# EAGLE board 2_dsub to pins (EAGLE 7.2.0)
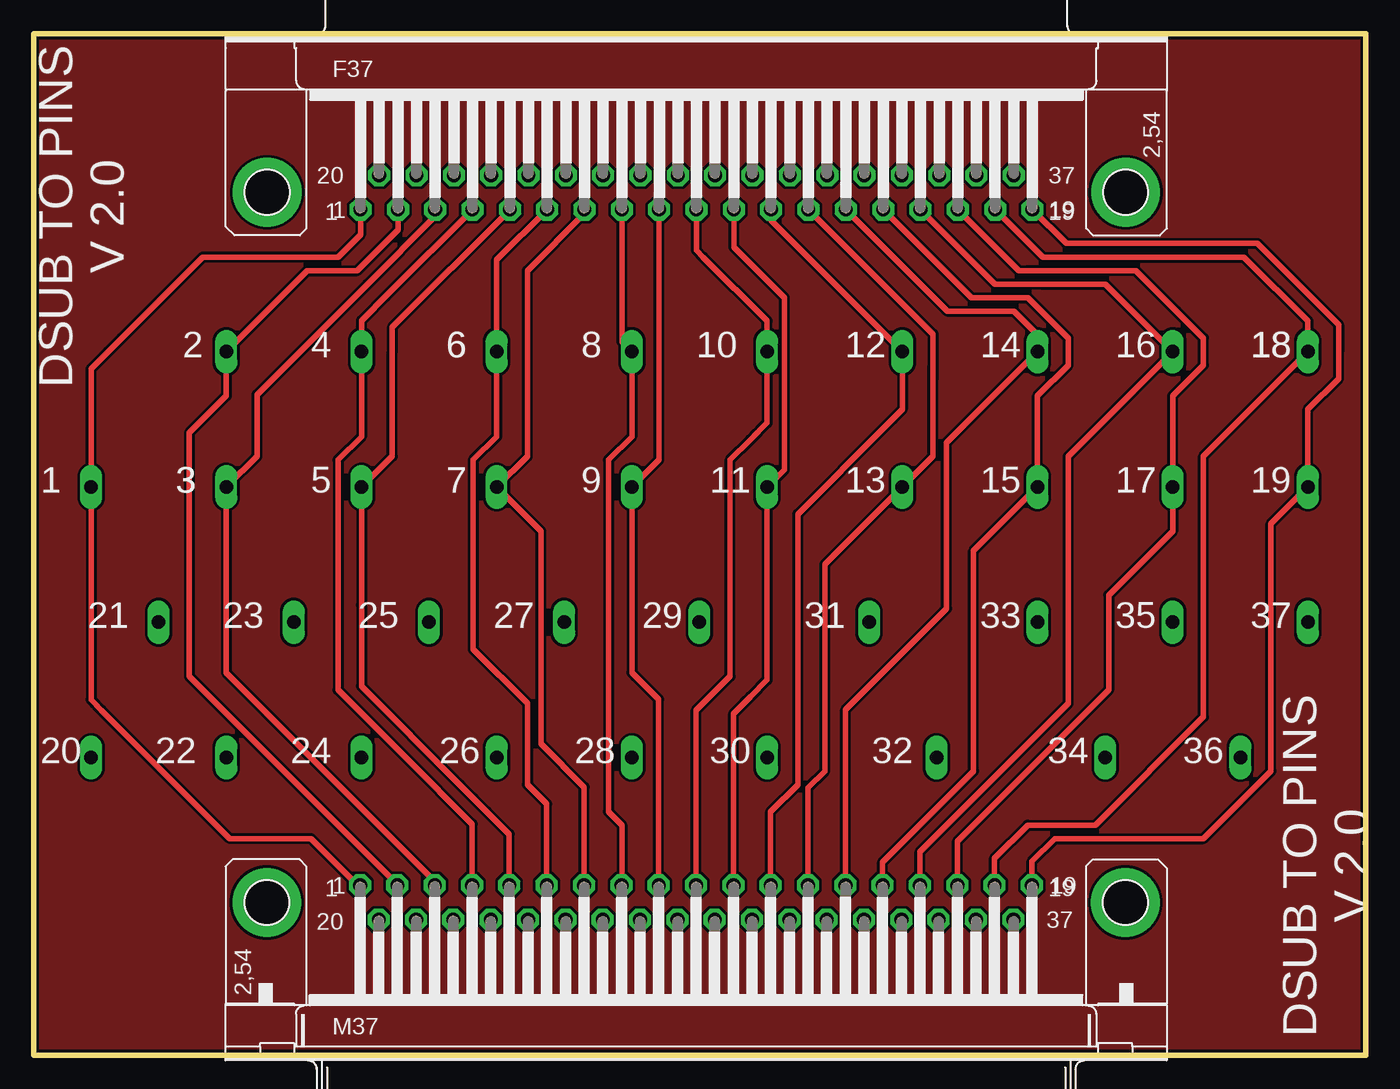
[diagram p0: board, top side]
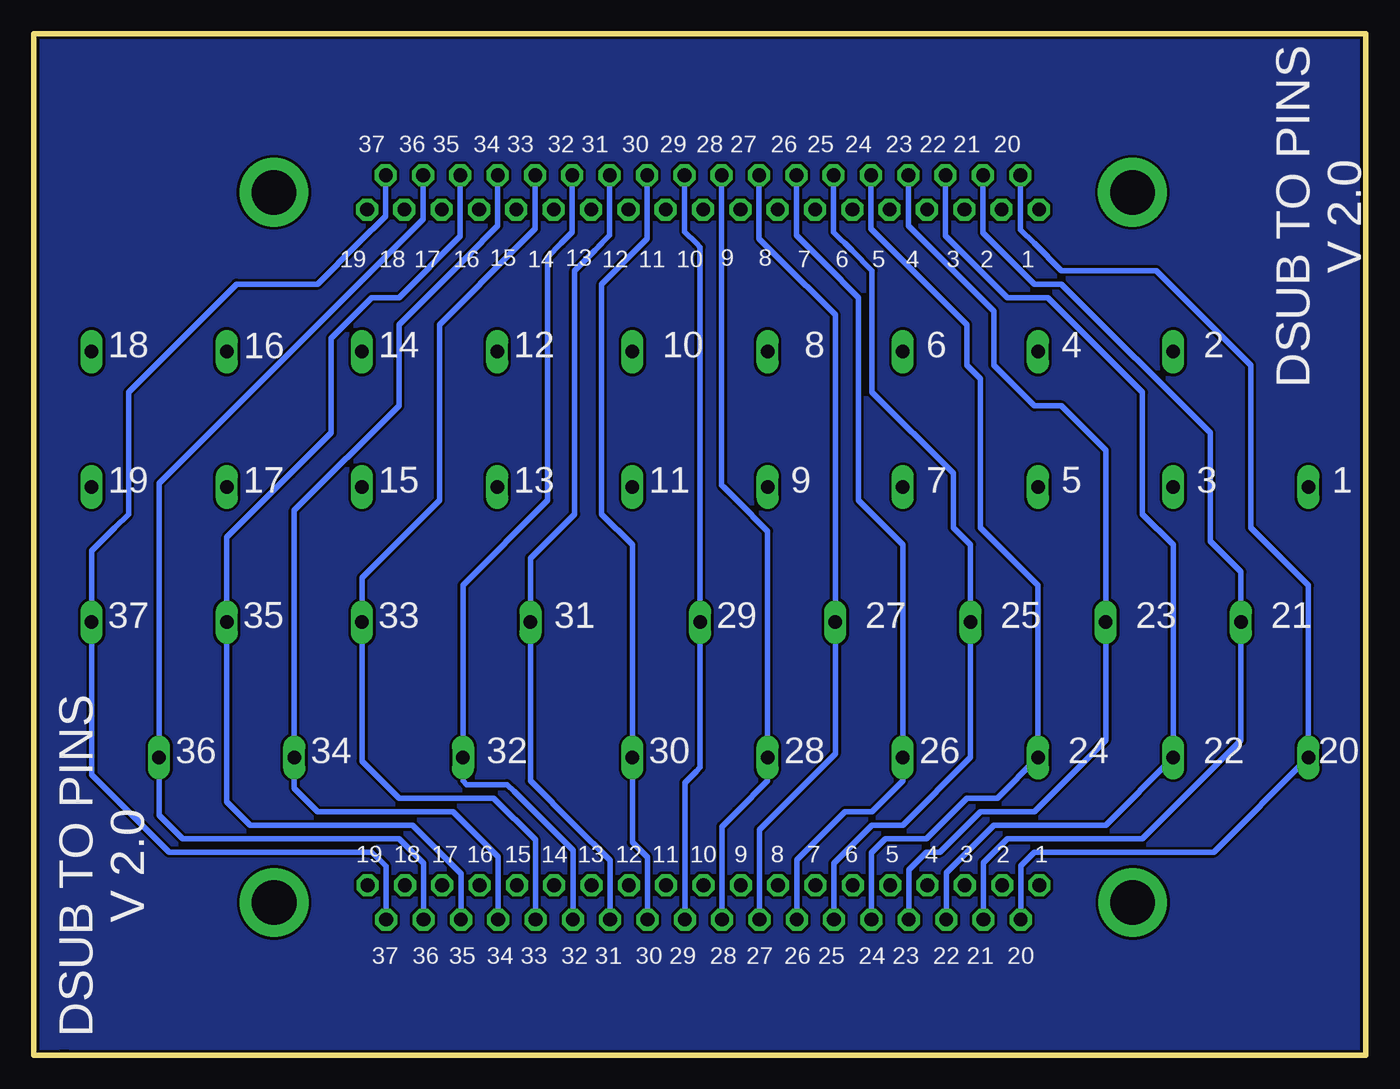
[diagram p1: board, bottom side, seen from below]

Size 98.5 x 75.5 mm. Coordinates in mm from the lower left corner, seen from the top.
Outline: 96.5,0 0,0 0,75.5 98.5,75.5 98.5,0 96,0
Copper layers (1*16): Top 0.035mm / dielectric 1.5mm / Bottom 0.035mm
Design rules "SparkFun-2-layer": minimum track width 7mil, minimum drill 15mil, track to track 8mil, track to pad 8mil, pad to pad 8mil, via to via 8mil, smd to smd 8mil, copper to edge 8mil, drill to drill 8mil, minimum pad ring 12mil, minimum via ring 10mil, stop-mask expansion 4mil, vias tented up to drill 20mil, thermal gap 10mil

## Footprints (pad centres in the part's own frame; a part is rotated, then mirrored left to right if it is on the bottom)
22-23-2021 = drill 1 long: 1 -1.27,0
M37HP = drill 1.016 octagon: 1 -24.841,1.27; 2 -22.098,1.27; 3 -19.329,1.27; 4 -16.561,1.27; 5 -13.818,1.27; 6 -11.049,1.27; 7 -8.28,1.27; 8 -5.512,1.27; 9 -2.769,1.27; 10 0,1.27; 11 2.769,1.27; 12 5.512,1.27; 13 8.28,1.27; 14 11.049,1.27; 15 13.792,1.27; 16 16.561,1.27; 17 19.329,1.27; 18 22.073,1.27; 19 24.841,1.27; 20 -23.47,-1.27; 21 -20.701,-1.27; 22 -17.958,-1.27; 23 -15.189,-1.27; 24 -12.421,-1.27; 25 -9.652,-1.27; 26 -6.909,-1.27; 27 -4.14,-1.27; 28 -1.372,-1.27; 29 1.372,-1.27; 30 4.14,-1.27; 31 6.909,-1.27; 32 9.652,-1.27; 33 12.421,-1.27; 34 15.189,-1.27; 35 17.932,-1.27; 36 20.701,-1.27; 37 23.47,-1.27 | drill 3.302 pad 5.08: G1 -31.75,0; G2 31.75,0
F37HP = drill 1.016 octagon: 1 -24.841,-1.27; 2 -22.073,-1.27; 3 -19.329,-1.27; 4 -16.561,-1.27; 5 -13.792,-1.27; 6 -11.049,-1.27; 7 -8.28,-1.27; 8 -5.512,-1.27; 9 -2.769,-1.27; 10 0,-1.27; 11 2.769,-1.27; 12 5.512,-1.27; 13 8.28,-1.27; 14 11.049,-1.27; 15 13.818,-1.27; 16 16.561,-1.27; 17 19.329,-1.27; 18 22.098,-1.27; 19 24.841,-1.27; 20 -23.47,1.27; 21 -20.701,1.27; 22 -17.932,1.27; 23 -15.189,1.27; 24 -12.421,1.27; 25 -9.652,1.27; 26 -6.909,1.27; 27 -4.14,1.27; 28 -1.372,1.27; 29 1.372,1.27; 30 4.14,1.27; 31 6.909,1.27; 32 9.677,1.27; 33 12.421,1.27; 34 15.189,1.27; 35 17.958,1.27; 36 20.701,1.27; 37 23.47,1.27 | drill 3.302 pad 5.08: G1 -31.75,0; G2 31.75,0

## Placement (x,y rotation side)
X1  22-23-2021  [22-23-2021]  5.5,42 0 top
X2  22-23-2021  [22-23-2021]  15.5,52 0 top
X3  22-23-2021  [22-23-2021]  15.5,42 0 top
X4  22-23-2021  [22-23-2021]  25.5,52 0 top
X5  22-23-2021  [22-23-2021]  25.5,42 0 top
X6  22-23-2021  [22-23-2021]  35.5,52 0 top
X7  22-23-2021  [22-23-2021]  35.5,42 0 top
X8  22-23-2021  [22-23-2021]  45.5,52 0 top
X9  22-23-2021  [22-23-2021]  45.5,42 0 top
X10  22-23-2021  [22-23-2021]  55.5,52 0 top
X11  22-23-2021  [22-23-2021]  55.5,42 0 top
X12  22-23-2021  [22-23-2021]  65.5,52 0 top
X13  22-23-2021  [22-23-2021]  65.5,42 0 top
X14  22-23-2021  [22-23-2021]  75.5,52 0 top
X15  22-23-2021  [22-23-2021]  75.5,42 0 top
X16  22-23-2021  [22-23-2021]  85.5,52 0 top
X17  22-23-2021  [22-23-2021]  85.5,42 0 top
X18  22-23-2021  [22-23-2021]  95.5,52 0 top
X19  22-23-2021  [22-23-2021]  95.5,42 0 top
X20  22-23-2021  [22-23-2021]  5.5,22 0 top
X21  22-23-2021  [22-23-2021]  10.5,32 0 top
X22  22-23-2021  [22-23-2021]  15.5,22 0 top
X23  22-23-2021  [22-23-2021]  20.5,32 0 top
X24  22-23-2021  [22-23-2021]  25.5,22 0 top
X25  22-23-2021  [22-23-2021]  30.5,32 0 top
X26  22-23-2021  [22-23-2021]  35.5,22 0 top
X27  22-23-2021  [22-23-2021]  40.5,32 0 top
X28  22-23-2021  [22-23-2021]  45.5,22 0 top
X29  22-23-2021  [22-23-2021]  50.5,32 0 top
X30  22-23-2021  [22-23-2021]  55.5,22 0 top
X31  22-23-2021  [22-23-2021]  60.5,32 180 top
X32  22-23-2021  [22-23-2021]  65.5,22 180 top
X33  22-23-2021  [22-23-2021]  75.5,32 0 top
X34  22-23-2021  [22-23-2021]  80.5,22 0 top
X35  22-23-2021  [22-23-2021]  85.5,32 0 top
X36  22-23-2021  [22-23-2021]  90.5,22 0 top
X37  22-23-2021  [22-23-2021]  95.5,32 0 top
X40  [M37HP]  48.98,11.29 0 top
X41  [F37HP]  49,63.78 0 top

## Library data of the parts
X1-X37 = mayo; MF: MOLEX; MPN: 22-23-2021; OC_FARNELL: 1462926; OC_NEWARK: 25C3832
X40 X41 = con-subd; OC_FARNELL: unknown; OC_NEWARK: unknown

## Nets
1: X1.1 X40.1 X41.1
2: X2.1 X40.2 X41.2
3: X3.1 X40.3 X41.3
4: X4.1 X40.4 X41.4
5: X5.1 X40.5 X41.5
6: X6.1 X40.6 X41.6
7: X7.1 X40.7 X41.7
8: X8.1 X40.8 X41.8
9: X9.1 X40.9 X41.9
10: X10.1 X40.10 X41.10
11: X11.1 X40.11 X41.11
12: X12.1 X40.12 X41.12
13: X13.1 X40.13 X41.13
14: X14.1 X40.14 X41.14
15: X15.1 X40.15 X41.15
16: X16.1 X40.16 X41.16
17: X17.1 X40.17 X41.17
18: X18.1 X40.18 X41.18
19: X19.1 X40.19 X41.19
20: X20.1 X40.20 X41.20
21: X21.1 X40.21 X41.21
22: X22.1 X40.22 X41.22
23: X23.1 X40.23 X41.23
24: X24.1 X40.24 X41.24
25: X25.1 X40.25 X41.25
26: X26.1 X40.26 X41.26
27: X27.1 X40.27 X41.27
28: X28.1 X40.28 X41.28
29: X29.1 X40.29 X41.29
30: X30.1 X40.30 X41.30
31: X31.1 X40.31 X41.31
32: X32.1 X40.32 X41.32
33: X33.1 X40.33 X41.33
34: X34.1 X40.34 X41.34
35: X35.1 X40.35 X41.35
36: X36.1 X40.36 X41.36
37: X37.1 X40.37 X41.37

## Tracks (layer width: path | path; a pad name or v marks a point on that pad's centre or on a via)
1
  Top 0.406: X41.1 24.16,60.66 22.5,59 12.5,59 6.5,53 | 6.5,53 5.5,52 | 6.5,53 4.23,50.73 X1.1 4.23,26.27 5,25.5 | 14.5,16 13.5,17 | 13.5,17 5,25.5 | 5,25.5 4.5,26 | X40.1 23.94,12.56 20.5,16 14.5,16 | 14.5,16 13.5,17
2
  Top 0.406: X41.2 26.93,61 23.93,58 20.23,58 X2.1 14.23,48.73 11.5,46 11.5,28 22,17.5 | 22,17.5 22.5,17 | X40.2 26.88,12.62 22,17.5
3
  Top 0.406: X41.3 29.67,62 24.67,57 16.5,48.83 16.5,44.27 X3.1 14.23,28.27 15.5,27 | 15.5,27 24.5,18 29.65,12.85 X40.3 | 15.5,27 14.5,28
4
  Top 0.406: 26.21,56.28 25.93,56 26.21,56.28 | 26.21,56.28 X41.4 | X40.4 32.42,17.08 27.5,22 22.5,27 22.5,44 24.23,45.73 X4.1 24.23,54.3 26.21,56.28
5
  Top 0.406: X41.5 26.5,53.8 26.5,52 26.5,44.27 X5.1 24.23,33.27 24.23,27.27 31.5,20 33.5,18 | X40.5 35.16,16.34 33.5,18 | 33.5,18 32.5,19
6
  Top 0.406: X41.6 34.23,58.79 X6.1 34.23,45.73 32.5,44 32.5,30 36.5,26 36.5,20 37,19.5 | 37,19.5 37.5,19 | X40.6 37.93,18.57 37,19.5
7
  Top 0.406: X41.7 40.72,62.22 36.5,58 36.5,44.27 X7.1 37.5,38.73 37.5,23 40.7,19.8 X40.7
8
  Top 0.406: X41.8 43.49,52.74 X8.1 44.23,45.73 42.5,44 42.5,18 43.5,17 43.5,12.59 X40.8
9
  Top 0.406: X41.9 46.23,44 X9.1 44.23,28.27 45.5,27 | X40.9 46.21,26.29 45.5,27 | 45.5,27 44.5,28
10
  Top 0.406: X41.10 49,59.5 49.5,59 54.23,54.27 X10.1 54.23,46.73 53,45.5 | X40.10 48.98,25.48 51.5,28 51.5,44 53,45.5 | 53,45.5 53.5,46
11
  Top 0.406: X41.11 51.77,59.73 55.5,56 55.5,43.27 X11.1 54.23,27.73 53,26.5 | 53,26.5 52.5,26 | X40.11 51.75,25.25 53,26.5
12
  Top 0.406: X41.12 54.51,61.72 X12.1 64.23,47.73 63,46.5 | X40.12 54.49,17.99 56.5,20 56.5,40 63,46.5 | 63,46.5 63.5,47
13
  Top 0.406: X40.13 57.26,19.76 58.5,21 58.5,36.27 X13.1 66.5,44.27 66.5,51 | X41.13 66.5,53.29 66.5,51 | 66.5,51 66.5,50
14
  Top 0.406: X40.14 60.03,25.53 67.5,33 67.5,45.27 X14.1 74.23,53.27 72.5,55 67.56,55 X41.14
15
  Top 0.406: 75.5,54 76.5,53 76.5,51 74.23,48.73 X15.1 69.5,37.27 69.5,21 62.77,14.27 X40.15 | 75.5,54 74.5,55 | X41.15 69.33,56 72.5,56 73.5,56 75.5,54
16
  Top 0.406: X41.16 71.07,57 74.5,57 79.23,57 X16.1 76.5,44.27 76.5,26 65.54,15.04 X40.16
17
  Top 0.406: X40.17 68.31,15.81 68.5,16 79.5,27 79.5,34 84.23,38.73 X17.1 84.23,48.73 86.5,51 86.5,53 84.5,55 81.5,58 75.5,58 | 75.5,58 73.5,58 | X41.17 72.84,58 75.5,58
18
  Top 0.406: X41.18 72.61,61 74.61,59 78.5,59 | X40.18 71.05,14.55 73.5,17 78.5,17 86.5,25 86.5,44.27 X18.1 94.23,54.27 89.5,59 78.5,59 | 77.5,59 78.5,59
19
  Top 0.406: 96.5,52 96.5,50 94.23,47.73 X19.1 91.5,39.27 91.5,21 86.5,16 75.5,16 73.82,14.32 X40.19 | 96.5,52 96.5,54 | 96.5,54 95.5,55 | 78.5,60 80.5,60 | 80.5,60 90.5,60 96.5,54 | 96.5,54 96.5,52 | X41.19 76.35,60 80.5,60
20
  Bottom 0.406: X41.20 25.53,61.03 24.5,60 22.5,58 15.5,58 8.5,51 8.5,39 4.23,34.73 X20.1 11.23,15 24.5,15 25.51,13.99 X40.20
21
  Bottom 0.406: 26,58.5 24.5,57 22.5,57 11.5,46 11.5,38 9.23,35.73 X21.1 9.23,23.27 10,22.5 | 26,58.5 26.5,59 | X41.21 28.3,60.8 26,58.5 | X40.21 28.28,14.22 26.5,16 16.5,16 10,22.5 | 10,22.5 9.5,23
22
  Bottom 0.406: X41.22 31.07,60.57 28.5,58 26.5,56 23.5,56 16.5,49 16.5,40 14.23,37.73 X22.1 19.23,17 27.5,17 31.02,13.48 X40.22
23
  Bottom 0.406: X41.23 33.81,61.31 31.5,59 27.5,55 27.5,51 24.5,48 22.5,48 19.23,44.73 X23.1 19.23,23.27 24.5,18 28.5,18 31.5,15 32.5,15 33.79,13.71 X40.23
24
  Bottom 0.406: X41.24 36.58,61.08 34.5,59 29.5,54 29.5,51 28.5,50 28.5,39 24.23,34.73 X24.1 27.23,19 29.5,19 32.5,16 35.5,16 36.56,14.94 36.56,12.94 X40.24
25
  Bottom 0.406: 38,59.5 36.5,58 36.5,49 30.5,43 30.5,39 29.23,37.73 X25.1 29.23,22 34.23,17 36.5,17 38.5,15 | 38,59.5 38.5,60 | X41.25 39.35,60.85 38,59.5 | X40.25 39.33,14.17 39,14.5 | 39,14.5 38.5,15 | 38.5,15 39,14.5
26
  Bottom 0.406: 40,58.5 37.5,56 37.5,41 34.23,37.73 X26.1 34.23,20.27 36.5,18 38.5,18 | 40,58.5 40.5,59 | X41.26 42.09,60.59 40,58.5 | X40.26 42.07,14.43 41.5,15 40.5,16 39,17.5 | 38.5,18 39,17.5 | 38.5,18 39,17.5
27
  Bottom 0.406: X41.27 44.86,60.36 43.5,59 39.23,54.73 X27.1 39.23,22.27 44,17.5 | 44,17.5 44.5,17 | X40.27 44.84,16.66 44,17.5
28
  Bottom 0.406: 46.5,41 44.23,38.73 X28.1 44.23,20.27 46.5,18 47.61,16.89 X40.28 | 46.5,41 47.5,42 | X41.28 47.63,42.13 46.5,41
29
  Bottom 0.406: X41.29 50.37,60.87 49.5,60 49.23,59.73 X29.1 49.23,21.27 49.5,21 50.35,20.15 X40.29
30
  Bottom 0.406: X41.30 53.14,60.36 54.5,59 56.5,57 56.5,40 54.23,37.73 X30.1 54.23,15.73 53.5,15 53.12,14.62 X40.30
31
  Bottom 0.406: 57,59.5 58.5,58 58.5,40 61.77,36.73 X31.1 61.77,20.27 58.5,17 55.89,14.39 X40.31 | 57,59.5 56.5,60 | X41.31 55.91,60.59 57,59.5
32
  Bottom 0.406: X41.32 58.68,60.82 59.5,60 60.5,59 60.5,41 66.77,34.73 X32.1 66.77,20.27 66.5,20 63.5,20 | X40.32 58.63,15.13 63,19.5 | 63,19.5 63.5,20 | 63.5,20 63,19.5
33
  Bottom 0.406: X41.33 61.42,61.08 62.5,60 68.5,54 68.5,41 74.23,35.27 X33.1 74.23,21.73 71.5,19 64.5,19 61.4,15.9 X40.33
34
  Bottom 0.406: X41.34 64.19,61.31 66.5,59 71.5,54 71.5,48 79.23,40.27 X34.1 79.23,19.73 77.5,18 67.5,18 64.17,14.67 X40.34
35
  Bottom 0.406: 79.5,43 84.23,38.27 X35.1 84.23,18.73 82.5,17 70.5,17 | 79.5,43 78.5,44 | X41.35 66.96,60.54 71.5,56 73.5,56 76.5,53 76.5,46 79.5,43 | X40.35 66.91,13.41 70,16.5 | 70,16.5 70.5,17 | 70.5,17 70,16.5
36
  Bottom 0.406: X41.36 69.7,61.8 74.5,57 89.23,42.27 X36.1 89.23,17.73 87.5,16 71.5,16 69.68,14.18 X40.36
37
  Bottom 0.406: X41.37 72.47,62.03 74.5,60 77.5,57 83.5,57 91.5,49 91.5,40 92.5,39 94.23,37.27 X37.1 94.23,20.73 91.5,18 | 91.5,18 90.5,17 | X40.37 72.45,13.95 73.5,15 88.5,15 91.5,18
N$1
  pour Bottom: 0.5,75 98.5,75 98.5,0 0.5,0
N$2
  pour Top: 0.5,75 98.5,75 98.5,0 0.5,0

## Text on the board
tNames: 1 | 19 | DSUB TO PINS / V 2.0 | 2 | 4 | 6 | 6 | 8 | 10 | 12 | 14 | 16 | 18 | 18 | 1 | 3 | 3 | 5 | 7 | 9 | 11 | 13 | 15 | 17 | 19 | 21 | 23 | 25 | 27 | 29 | 31 | 33 | 35 | 37 | 20 | 22 | 24 | 26 | 28 | 30 | 32 | 34 | 36 | DSUB TO PINS / V 2.0 | 1 | 19
bNames: 20 | 21 | 22 | 23 | 24 | 25 | 26 | 27 | 28 | 29 | 30 | 31 | 32 | 33 | 34 | 35 | 36 | 37 | DSUB TO PINS / V 2.0 | 8 | 9 | 13 | 15 | 1 | 2 | 3 | 4 | 5 | 6 | 7 | 10 | 11 | 12 | 14 | 16 | 17 | 18 | 19 | 2 | 4 | 6 | 8 | 10 | 12 | 14 | 18 | 16 | 1 | 3 | 5 | 7 | 9 | 11 | 13 | 15 | 17 | 19 | 21 | 23 | 25 | 27 | 29 | 31 | 33 | 35 | 37 | 20 | 22 | 24 | 26 | 28 | 30 | 32 | 34 | 36 | 1 | 2 | 3 | 4 | 5 | 6 | 7 | 8 | 9 | 10 | 11 | 12 | 13 | 14 | 15 | 16 | 17 | 18 | 19 | DSUB TO PINS / V 2.0 | 20 | 21 | 22 | 23 | 24 | 25 | 26 | 27 | 28 | 29 | 30 | 31 | 32 | 33 | 34 | 35 | 36 | 37